# EAGLE board 64panel-Panel (EAGLE 9.1.0), part 1 of 4
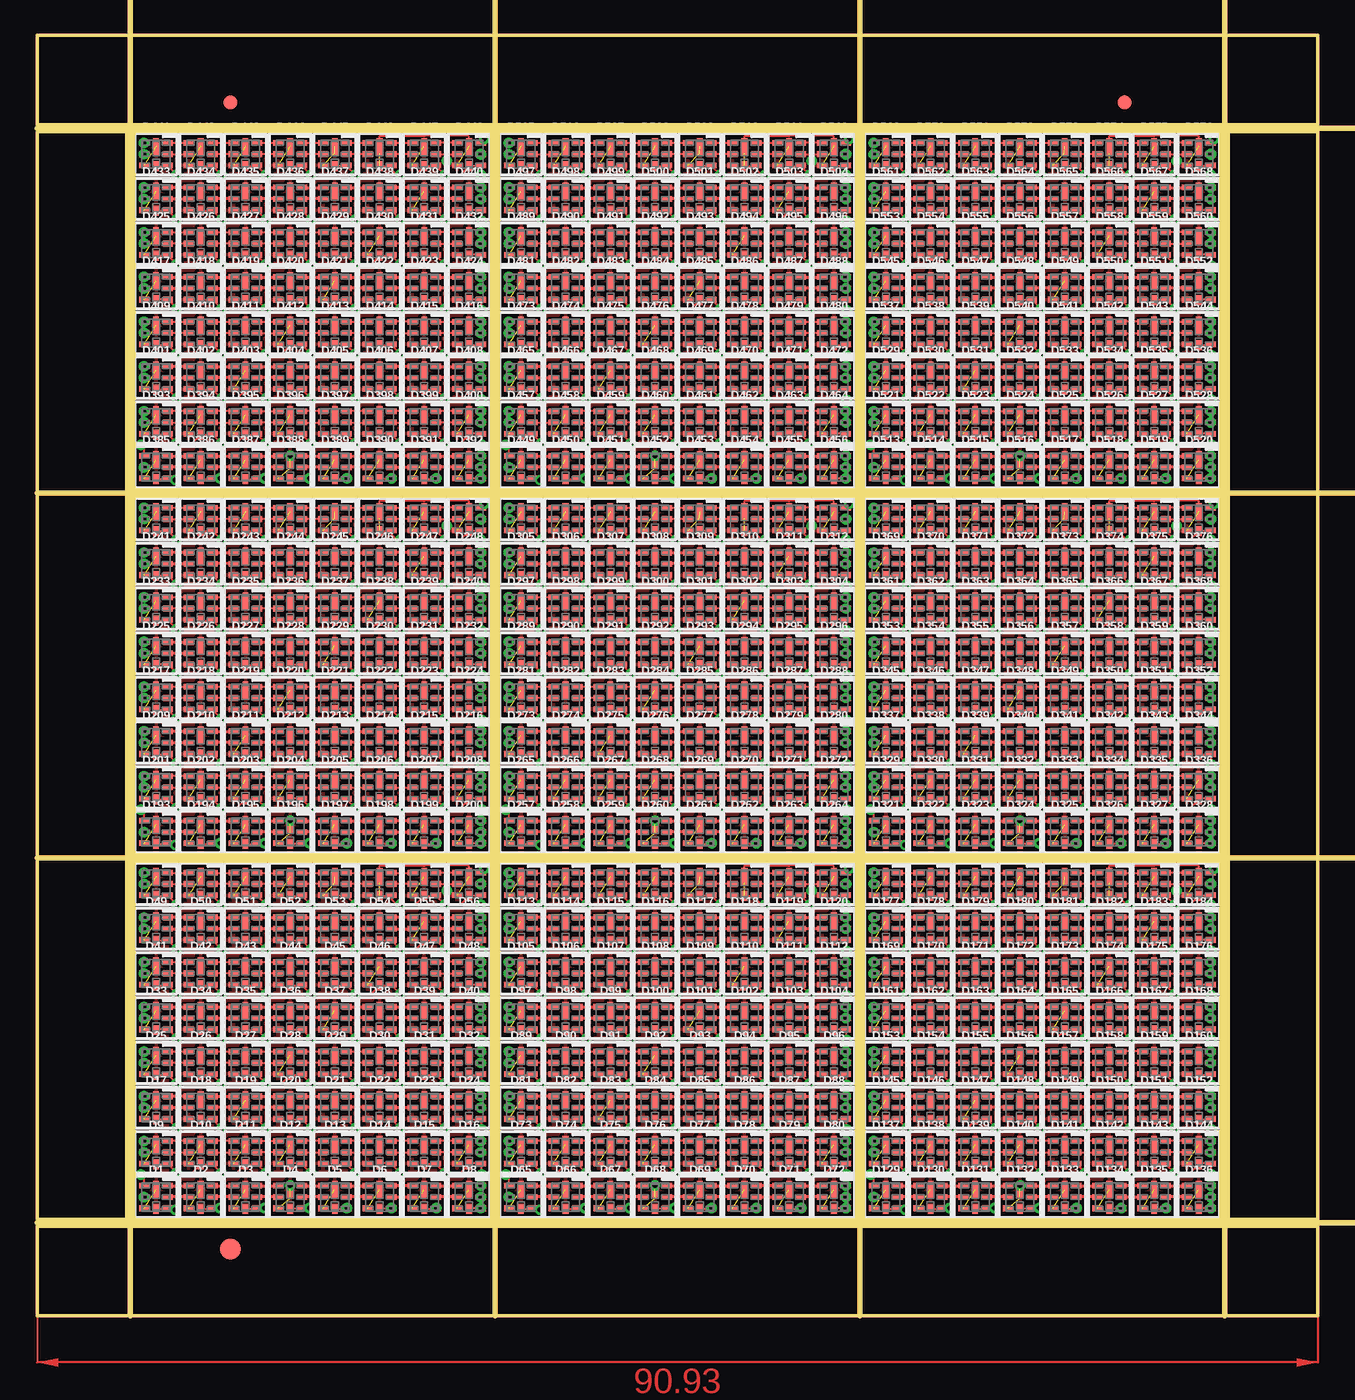
[diagram p0: board, top side]
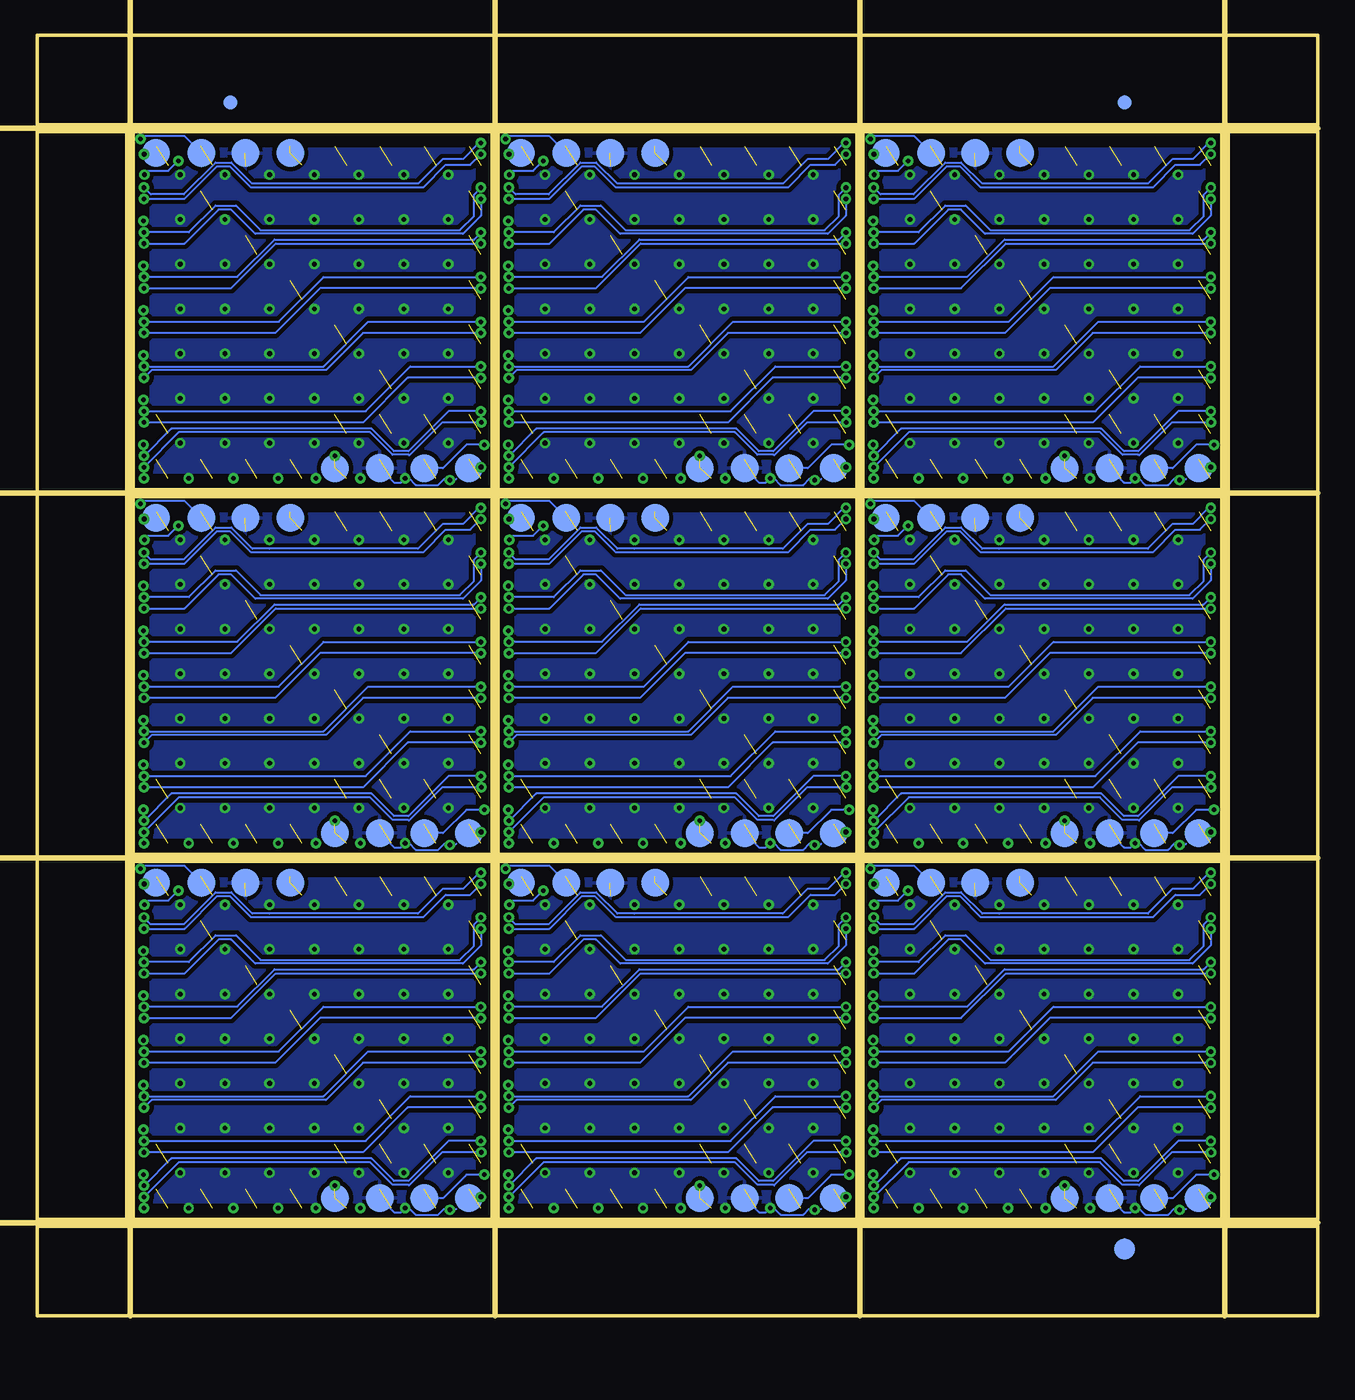
[diagram p1: board, bottom side, seen from below]

Size 90.93 x 90.93 mm. Coordinates in mm from the lower left corner, seen from the top.
Outline: 6.86,6.86 32.26,6.86 32.26,32.26 6.86,32.26 6.86,6.86
Outline: 32.77,6.86 58.17,6.86 58.17,32.26 32.77,32.26 32.77,6.86
Outline: 58.67,6.86 84.07,6.86 84.07,32.26 58.67,32.26 58.67,6.86
Outline: 6.86,32.77 32.26,32.77 32.26,58.17 6.86,58.17 6.86,32.77
Outline: 32.77,32.77 58.17,32.77 58.17,58.17 32.77,58.17 32.77,32.77
Outline: 58.67,32.77 84.07,32.77 84.07,58.17 58.67,58.17 58.67,32.77
Outline: 6.86,58.67 32.26,58.67 32.26,84.07 6.86,84.07 6.86,58.67
Outline: 32.77,58.67 58.17,58.67 58.17,84.07 32.77,84.07 32.77,58.67
Outline: 58.67,58.67 84.07,58.67 84.07,84.07 58.67,84.07 58.67,58.67
Outline: 0,6.35 90.93,6.35 90.93,0 0,0 0,6.35
Outline: 84.58,84.07 90.93,84.07 90.93,6.86 84.58,6.86 84.58,84.07
Outline: 0,90.93 90.93,90.93 90.93,84.58 0,84.58 0,90.93
Outline: 0,84.07 6.35,84.07 6.35,6.86 0,6.86 0,84.07
Copper layers (1*16): Top 0.035mm / dielectric 1.5mm / Bottom 0.035mm
Design rules "default": minimum track width 6mil, minimum drill 0.35mm, track to track 6mil, track to pad 6mil, pad to pad 6mil, via to via 6mil, smd to smd 6mil, copper to edge 40mil, drill to drill 6mil, minimum pad ring 10mil, minimum via ring 8mil, stop-mask expansion 4mil, vias tented up to drill 0mil, thermal gap 10mil
Milling: 8 lines

## Footprints (pad centres in the part's own frame; a part is rotated, then mirrored left to right if it is on the bottom)
APA102-2020 = smd 0.7 x 0.4: CKI -0.85,0; CKO 0.85,0; GND -0.85,-0.8; SDI -0.85,0.8; SDO 0.85,0.8; VDD 0.85,-0.8 | smd 0.4 x 1.2: GNDPAD 0,0.55 | smd 0.4 x 0.7: VDDPAD 0,-0.85
FIDUCIAL-1X2 = smd 1 x 1: 1 0,0
FIDUCIAL-1.5X3 = smd 1.5 x 1.5: 1 0,0
CIRCULARPAD = smd 2 x 2: P$1 0,0

## Placement (x,y rotation side)
D1  APA1022020  [APA102-2020]  8.45,8.45 0 top
D2  APA1022020  [APA102-2020]  11.62,8.45 0 top
D3  APA1022020  [APA102-2020]  14.8,8.45 0 top
D4  APA1022020  [APA102-2020]  17.97,8.45 0 top
D5  APA1022020  [APA102-2020]  21.15,8.45 0 top
D6  APA1022020  [APA102-2020]  24.32,8.45 0 top
D7  APA1022020  [APA102-2020]  27.5,8.45 0 top
D8  APA1022020  [APA102-2020]  30.67,8.45 0 top
D9  APA1022020  [APA102-2020]  8.45,11.62 0 top
D10  APA1022020  [APA102-2020]  11.62,11.62 0 top
D11  APA1022020  [APA102-2020]  14.8,11.62 0 top
D12  APA1022020  [APA102-2020]  17.97,11.62 0 top
D13  APA1022020  [APA102-2020]  21.15,11.62 0 top
D14  APA1022020  [APA102-2020]  24.32,11.62 0 top
D15  APA1022020  [APA102-2020]  27.5,11.62 0 top
D16  APA1022020  [APA102-2020]  30.67,11.62 0 top
D17  APA1022020  [APA102-2020]  8.45,14.8 0 top
D18  APA1022020  [APA102-2020]  11.62,14.8 0 top
D19  APA1022020  [APA102-2020]  14.8,14.8 0 top
D20  APA1022020  [APA102-2020]  17.97,14.8 0 top
D21  APA1022020  [APA102-2020]  21.15,14.8 0 top
D22  APA1022020  [APA102-2020]  24.32,14.8 0 top
D23  APA1022020  [APA102-2020]  27.5,14.8 0 top
D24  APA1022020  [APA102-2020]  30.67,14.8 0 top
D25  APA1022020  [APA102-2020]  8.45,17.97 0 top
D26  APA1022020  [APA102-2020]  11.62,17.97 0 top
D27  APA1022020  [APA102-2020]  14.8,17.97 0 top
D28  APA1022020  [APA102-2020]  17.97,17.97 0 top
D29  APA1022020  [APA102-2020]  21.15,17.97 0 top
D30  APA1022020  [APA102-2020]  24.32,17.97 0 top
D31  APA1022020  [APA102-2020]  27.5,17.97 0 top
D32  APA1022020  [APA102-2020]  30.67,17.97 0 top
D33  APA1022020  [APA102-2020]  8.45,21.15 0 top
D34  APA1022020  [APA102-2020]  11.62,21.15 0 top
D35  APA1022020  [APA102-2020]  14.8,21.15 0 top
D36  APA1022020  [APA102-2020]  17.97,21.15 0 top
D37  APA1022020  [APA102-2020]  21.15,21.15 0 top
D38  APA1022020  [APA102-2020]  24.32,21.15 0 top
D39  APA1022020  [APA102-2020]  27.5,21.15 0 top
D40  APA1022020  [APA102-2020]  30.67,21.15 0 top
D41  APA1022020  [APA102-2020]  8.45,24.32 0 top
D42  APA1022020  [APA102-2020]  11.62,24.32 0 top
D43  APA1022020  [APA102-2020]  14.8,24.32 0 top
D44  APA1022020  [APA102-2020]  17.97,24.32 0 top
D45  APA1022020  [APA102-2020]  21.15,24.32 0 top
D46  APA1022020  [APA102-2020]  24.32,24.32 0 top
D47  APA1022020  [APA102-2020]  27.5,24.32 0 top
D48  APA1022020  [APA102-2020]  30.67,24.32 0 top
D49  APA1022020  [APA102-2020]  8.45,27.5 0 top
D50  APA1022020  [APA102-2020]  11.62,27.5 0 top
D51  APA1022020  [APA102-2020]  14.8,27.5 0 top
D52  APA1022020  [APA102-2020]  17.97,27.5 0 top
D53  APA1022020  [APA102-2020]  21.15,27.5 0 top
D54  APA1022020  [APA102-2020]  24.32,27.5 0 top
D55  APA1022020  [APA102-2020]  27.5,27.5 0 top
D56  APA1022020  [APA102-2020]  30.67,27.5 0 top
D57  APA1022020  [APA102-2020]  8.45,30.67 0 top
D58  APA1022020  [APA102-2020]  11.62,30.67 0 top
D59  APA1022020  [APA102-2020]  14.8,30.67 0 top
D60  APA1022020  [APA102-2020]  17.97,30.67 0 top
D61  APA1022020  [APA102-2020]  21.15,30.67 0 top
D62  APA1022020  [APA102-2020]  24.32,30.67 0 top
D63  APA1022020  [APA102-2020]  27.5,30.67 0 top
D64  APA1022020  [APA102-2020]  30.67,30.67 0 top
D65  APA1022020  [APA102-2020]  34.35,8.45 0 top
D66  APA1022020  [APA102-2020]  37.53,8.45 0 top
D67  APA1022020  [APA102-2020]  40.7,8.45 0 top
D68  APA1022020  [APA102-2020]  43.88,8.45 0 top
D69  APA1022020  [APA102-2020]  47.05,8.45 0 top
D70  APA1022020  [APA102-2020]  50.23,8.45 0 top
D71  APA1022020  [APA102-2020]  53.4,8.45 0 top
D72  APA1022020  [APA102-2020]  56.58,8.45 0 top
D73  APA1022020  [APA102-2020]  34.35,11.62 0 top
D74  APA1022020  [APA102-2020]  37.53,11.62 0 top
D75  APA1022020  [APA102-2020]  40.7,11.62 0 top
D76  APA1022020  [APA102-2020]  43.88,11.62 0 top
D77  APA1022020  [APA102-2020]  47.05,11.62 0 top
D78  APA1022020  [APA102-2020]  50.23,11.62 0 top
D79  APA1022020  [APA102-2020]  53.4,11.62 0 top
D80  APA1022020  [APA102-2020]  56.58,11.62 0 top
D81  APA1022020  [APA102-2020]  34.35,14.8 0 top
D82  APA1022020  [APA102-2020]  37.53,14.8 0 top
D83  APA1022020  [APA102-2020]  40.7,14.8 0 top
D84  APA1022020  [APA102-2020]  43.88,14.8 0 top
D85  APA1022020  [APA102-2020]  47.05,14.8 0 top
D86  APA1022020  [APA102-2020]  50.23,14.8 0 top
D87  APA1022020  [APA102-2020]  53.4,14.8 0 top
D88  APA1022020  [APA102-2020]  56.58,14.8 0 top
D89  APA1022020  [APA102-2020]  34.35,17.97 0 top
D90  APA1022020  [APA102-2020]  37.53,17.97 0 top
D91  APA1022020  [APA102-2020]  40.7,17.97 0 top
D92  APA1022020  [APA102-2020]  43.88,17.97 0 top
D93  APA1022020  [APA102-2020]  47.05,17.97 0 top
D94  APA1022020  [APA102-2020]  50.23,17.97 0 top
D95  APA1022020  [APA102-2020]  53.4,17.97 0 top
D96  APA1022020  [APA102-2020]  56.58,17.97 0 top
D97  APA1022020  [APA102-2020]  34.35,21.15 0 top
D98  APA1022020  [APA102-2020]  37.53,21.15 0 top
D99  APA1022020  [APA102-2020]  40.7,21.15 0 top
D100  APA1022020  [APA102-2020]  43.88,21.15 0 top
D101  APA1022020  [APA102-2020]  47.05,21.15 0 top
D102  APA1022020  [APA102-2020]  50.23,21.15 0 top
D103  APA1022020  [APA102-2020]  53.4,21.15 0 top
D104  APA1022020  [APA102-2020]  56.58,21.15 0 top
D105  APA1022020  [APA102-2020]  34.35,24.32 0 top
D106  APA1022020  [APA102-2020]  37.53,24.32 0 top
D107  APA1022020  [APA102-2020]  40.7,24.32 0 top
D108  APA1022020  [APA102-2020]  43.88,24.32 0 top
D109  APA1022020  [APA102-2020]  47.05,24.32 0 top
D110  APA1022020  [APA102-2020]  50.23,24.32 0 top
D111  APA1022020  [APA102-2020]  53.4,24.32 0 top
D112  APA1022020  [APA102-2020]  56.58,24.32 0 top
D113  APA1022020  [APA102-2020]  34.35,27.5 0 top
D114  APA1022020  [APA102-2020]  37.53,27.5 0 top
D115  APA1022020  [APA102-2020]  40.7,27.5 0 top
D116  APA1022020  [APA102-2020]  43.88,27.5 0 top
D117  APA1022020  [APA102-2020]  47.05,27.5 0 top
D118  APA1022020  [APA102-2020]  50.23,27.5 0 top
D119  APA1022020  [APA102-2020]  53.4,27.5 0 top
D120  APA1022020  [APA102-2020]  56.58,27.5 0 top
D121  APA1022020  [APA102-2020]  34.35,30.67 0 top
D122  APA1022020  [APA102-2020]  37.53,30.67 0 top
D123  APA1022020  [APA102-2020]  40.7,30.67 0 top
D124  APA1022020  [APA102-2020]  43.88,30.67 0 top
D125  APA1022020  [APA102-2020]  47.05,30.67 0 top
D126  APA1022020  [APA102-2020]  50.23,30.67 0 top
D127  APA1022020  [APA102-2020]  53.4,30.67 0 top
D128  APA1022020  [APA102-2020]  56.58,30.67 0 top
D129  APA1022020  [APA102-2020]  60.26,8.45 0 top
D130  APA1022020  [APA102-2020]  63.44,8.45 0 top
D131  APA1022020  [APA102-2020]  66.61,8.45 0 top
D132  APA1022020  [APA102-2020]  69.79,8.45 0 top
D133  APA1022020  [APA102-2020]  72.96,8.45 0 top
D134  APA1022020  [APA102-2020]  76.14,8.45 0 top
D135  APA1022020  [APA102-2020]  79.31,8.45 0 top
D136  APA1022020  [APA102-2020]  82.49,8.45 0 top
D137  APA1022020  [APA102-2020]  60.26,11.62 0 top
D138  APA1022020  [APA102-2020]  63.44,11.62 0 top
D139  APA1022020  [APA102-2020]  66.61,11.62 0 top
D140  APA1022020  [APA102-2020]  69.79,11.62 0 top
D141  APA1022020  [APA102-2020]  72.96,11.62 0 top
D142  APA1022020  [APA102-2020]  76.14,11.62 0 top
D143  APA1022020  [APA102-2020]  79.31,11.62 0 top
D144  APA1022020  [APA102-2020]  82.49,11.62 0 top
D145  APA1022020  [APA102-2020]  60.26,14.8 0 top
D146  APA1022020  [APA102-2020]  63.44,14.8 0 top
D147  APA1022020  [APA102-2020]  66.61,14.8 0 top
D148  APA1022020  [APA102-2020]  69.79,14.8 0 top
D149  APA1022020  [APA102-2020]  72.96,14.8 0 top
D150  APA1022020  [APA102-2020]  76.14,14.8 0 top
D151  APA1022020  [APA102-2020]  79.31,14.8 0 top
D152  APA1022020  [APA102-2020]  82.49,14.8 0 top
D153  APA1022020  [APA102-2020]  60.26,17.97 0 top
D154  APA1022020  [APA102-2020]  63.44,17.97 0 top
D155  APA1022020  [APA102-2020]  66.61,17.97 0 top
D156  APA1022020  [APA102-2020]  69.79,17.97 0 top
D157  APA1022020  [APA102-2020]  72.96,17.97 0 top
D158  APA1022020  [APA102-2020]  76.14,17.97 0 top
D159  APA1022020  [APA102-2020]  79.31,17.97 0 top
D160  APA1022020  [APA102-2020]  82.49,17.97 0 top
D161  APA1022020  [APA102-2020]  60.26,21.15 0 top
D162  APA1022020  [APA102-2020]  63.44,21.15 0 top
D163  APA1022020  [APA102-2020]  66.61,21.15 0 top
D164  APA1022020  [APA102-2020]  69.79,21.15 0 top
D165  APA1022020  [APA102-2020]  72.96,21.15 0 top
D166  APA1022020  [APA102-2020]  76.14,21.15 0 top
D167  APA1022020  [APA102-2020]  79.31,21.15 0 top
D168  APA1022020  [APA102-2020]  82.49,21.15 0 top
D169  APA1022020  [APA102-2020]  60.26,24.32 0 top
D170  APA1022020  [APA102-2020]  63.44,24.32 0 top
D171  APA1022020  [APA102-2020]  66.61,24.32 0 top
D172  APA1022020  [APA102-2020]  69.79,24.32 0 top
D173  APA1022020  [APA102-2020]  72.96,24.32 0 top
D174  APA1022020  [APA102-2020]  76.14,24.32 0 top
D175  APA1022020  [APA102-2020]  79.31,24.32 0 top
D176  APA1022020  [APA102-2020]  82.49,24.32 0 top
D177  APA1022020  [APA102-2020]  60.26,27.5 0 top
D178  APA1022020  [APA102-2020]  63.44,27.5 0 top
D179  APA1022020  [APA102-2020]  66.61,27.5 0 top
D180  APA1022020  [APA102-2020]  69.79,27.5 0 top
D181  APA1022020  [APA102-2020]  72.96,27.5 0 top
D182  APA1022020  [APA102-2020]  76.14,27.5 0 top
D183  APA1022020  [APA102-2020]  79.31,27.5 0 top
D184  APA1022020  [APA102-2020]  82.49,27.5 0 top
D185  APA1022020  [APA102-2020]  60.26,30.67 0 top
D186  APA1022020  [APA102-2020]  63.44,30.67 0 top
D187  APA1022020  [APA102-2020]  66.61,30.67 0 top
D188  APA1022020  [APA102-2020]  69.79,30.67 0 top
D189  APA1022020  [APA102-2020]  72.96,30.67 0 top
D190  APA1022020  [APA102-2020]  76.14,30.67 0 top
D191  APA1022020  [APA102-2020]  79.31,30.67 0 top
D192  APA1022020  [APA102-2020]  82.49,30.67 0 top
D193  APA1022020  [APA102-2020]  8.45,34.35 0 top
D194  APA1022020  [APA102-2020]  11.62,34.35 0 top
D195  APA1022020  [APA102-2020]  14.8,34.35 0 top
D196  APA1022020  [APA102-2020]  17.97,34.35 0 top
D197  APA1022020  [APA102-2020]  21.15,34.35 0 top
D198  APA1022020  [APA102-2020]  24.32,34.35 0 top
D199  APA1022020  [APA102-2020]  27.5,34.35 0 top
D200  APA1022020  [APA102-2020]  30.67,34.35 0 top
D201  APA1022020  [APA102-2020]  8.45,37.53 0 top
D202  APA1022020  [APA102-2020]  11.62,37.53 0 top
D203  APA1022020  [APA102-2020]  14.8,37.53 0 top
D204  APA1022020  [APA102-2020]  17.97,37.53 0 top
D205  APA1022020  [APA102-2020]  21.15,37.53 0 top
D206  APA1022020  [APA102-2020]  24.32,37.53 0 top
D207  APA1022020  [APA102-2020]  27.5,37.53 0 top
D208  APA1022020  [APA102-2020]  30.67,37.53 0 top
D209  APA1022020  [APA102-2020]  8.45,40.7 0 top
D210  APA1022020  [APA102-2020]  11.62,40.7 0 top
D211  APA1022020  [APA102-2020]  14.8,40.7 0 top
D212  APA1022020  [APA102-2020]  17.97,40.7 0 top
D213  APA1022020  [APA102-2020]  21.15,40.7 0 top
D214  APA1022020  [APA102-2020]  24.32,40.7 0 top
D215  APA1022020  [APA102-2020]  27.5,40.7 0 top
D216  APA1022020  [APA102-2020]  30.67,40.7 0 top
D217  APA1022020  [APA102-2020]  8.45,43.88 0 top
D218  APA1022020  [APA102-2020]  11.62,43.88 0 top
D219  APA1022020  [APA102-2020]  14.8,43.88 0 top
D220  APA1022020  [APA102-2020]  17.97,43.88 0 top
D221  APA1022020  [APA102-2020]  21.15,43.88 0 top
D222  APA1022020  [APA102-2020]  24.32,43.88 0 top
D223  APA1022020  [APA102-2020]  27.5,43.88 0 top
D224  APA1022020  [APA102-2020]  30.67,43.88 0 top
D225  APA1022020  [APA102-2020]  8.45,47.05 0 top
D226  APA1022020  [APA102-2020]  11.62,47.05 0 top
D227  APA1022020  [APA102-2020]  14.8,47.05 0 top
D228  APA1022020  [APA102-2020]  17.97,47.05 0 top
D229  APA1022020  [APA102-2020]  21.15,47.05 0 top
D230  APA1022020  [APA102-2020]  24.32,47.05 0 top
D231  APA1022020  [APA102-2020]  27.5,47.05 0 top
D232  APA1022020  [APA102-2020]  30.67,47.05 0 top
D233  APA1022020  [APA102-2020]  8.45,50.23 0 top
D234  APA1022020  [APA102-2020]  11.62,50.23 0 top
D235  APA1022020  [APA102-2020]  14.8,50.23 0 top
D236  APA1022020  [APA102-2020]  17.97,50.23 0 top
D237  APA1022020  [APA102-2020]  21.15,50.23 0 top
D238  APA1022020  [APA102-2020]  24.32,50.23 0 top
D239  APA1022020  [APA102-2020]  27.5,50.23 0 top
D240  APA1022020  [APA102-2020]  30.67,50.23 0 top
D241  APA1022020  [APA102-2020]  8.45,53.4 0 top
D242  APA1022020  [APA102-2020]  11.62,53.4 0 top
D243  APA1022020  [APA102-2020]  14.8,53.4 0 top
D244  APA1022020  [APA102-2020]  17.97,53.4 0 top
D245  APA1022020  [APA102-2020]  21.15,53.4 0 top
D246  APA1022020  [APA102-2020]  24.32,53.4 0 top
D247  APA1022020  [APA102-2020]  27.5,53.4 0 top
D248  APA1022020  [APA102-2020]  30.67,53.4 0 top
D249  APA1022020  [APA102-2020]  8.45,56.58 0 top
D250  APA1022020  [APA102-2020]  11.62,56.58 0 top
D251  APA1022020  [APA102-2020]  14.8,56.58 0 top
D252  APA1022020  [APA102-2020]  17.97,56.58 0 top
D253  APA1022020  [APA102-2020]  21.15,56.58 0 top
D254  APA1022020  [APA102-2020]  24.32,56.58 0 top
D255  APA1022020  [APA102-2020]  27.5,56.58 0 top
D256  APA1022020  [APA102-2020]  30.67,56.58 0 top
D257  APA1022020  [APA102-2020]  34.35,34.35 0 top
D258  APA1022020  [APA102-2020]  37.53,34.35 0 top
D259  APA1022020  [APA102-2020]  40.7,34.35 0 top
D260  APA1022020  [APA102-2020]  43.88,34.35 0 top
D261  APA1022020  [APA102-2020]  47.05,34.35 0 top
D262  APA1022020  [APA102-2020]  50.23,34.35 0 top
D263  APA1022020  [APA102-2020]  53.4,34.35 0 top
D264  APA1022020  [APA102-2020]  56.58,34.35 0 top
D265  APA1022020  [APA102-2020]  34.35,37.53 0 top
D266  APA1022020  [APA102-2020]  37.53,37.53 0 top
D267  APA1022020  [APA102-2020]  40.7,37.53 0 top
D268  APA1022020  [APA102-2020]  43.88,37.53 0 top
D269  APA1022020  [APA102-2020]  47.05,37.53 0 top
D270  APA1022020  [APA102-2020]  50.23,37.53 0 top
D271  APA1022020  [APA102-2020]  53.4,37.53 0 top
D272  APA1022020  [APA102-2020]  56.58,37.53 0 top
D273  APA1022020  [APA102-2020]  34.35,40.7 0 top
D274  APA1022020  [APA102-2020]  37.53,40.7 0 top
D275  APA1022020  [APA102-2020]  40.7,40.7 0 top
D276  APA1022020  [APA102-2020]  43.88,40.7 0 top
D277  APA1022020  [APA102-2020]  47.05,40.7 0 top
D278  APA1022020  [APA102-2020]  50.23,40.7 0 top
D279  APA1022020  [APA102-2020]  53.4,40.7 0 top
D280  APA1022020  [APA102-2020]  56.58,40.7 0 top
D281  APA1022020  [APA102-2020]  34.35,43.88 0 top
D282  APA1022020  [APA102-2020]  37.53,43.88 0 top
D283  APA1022020  [APA102-2020]  40.7,43.88 0 top
D284  APA1022020  [APA102-2020]  43.88,43.88 0 top
D285  APA1022020  [APA102-2020]  47.05,43.88 0 top
D286  APA1022020  [APA102-2020]  50.23,43.88 0 top
D287  APA1022020  [APA102-2020]  53.4,43.88 0 top
D288  APA1022020  [APA102-2020]  56.58,43.88 0 top
D289  APA1022020  [APA102-2020]  34.35,47.05 0 top
D290  APA1022020  [APA102-2020]  37.53,47.05 0 top
D291  APA1022020  [APA102-2020]  40.7,47.05 0 top
D292  APA1022020  [APA102-2020]  43.88,47.05 0 top
D293  APA1022020  [APA102-2020]  47.05,47.05 0 top
D294  APA1022020  [APA102-2020]  50.23,47.05 0 top
D295  APA1022020  [APA102-2020]  53.4,47.05 0 top
D296  APA1022020  [APA102-2020]  56.58,47.05 0 top
D297  APA1022020  [APA102-2020]  34.35,50.23 0 top
D298  APA1022020  [APA102-2020]  37.53,50.23 0 top
D299  APA1022020  [APA102-2020]  40.7,50.23 0 top
D300  APA1022020  [APA102-2020]  43.88,50.23 0 top
D301  APA1022020  [APA102-2020]  47.05,50.23 0 top
D302  APA1022020  [APA102-2020]  50.23,50.23 0 top
D303  APA1022020  [APA102-2020]  53.4,50.23 0 top
D304  APA1022020  [APA102-2020]  56.58,50.23 0 top
D305  APA1022020  [APA102-2020]  34.35,53.4 0 top
D306  APA1022020  [APA102-2020]  37.53,53.4 0 top
D307  APA1022020  [APA102-2020]  40.7,53.4 0 top
D308  APA1022020  [APA102-2020]  43.88,53.4 0 top
D309  APA1022020  [APA102-2020]  47.05,53.4 0 top
D310  APA1022020  [APA102-2020]  50.23,53.4 0 top
D311  APA1022020  [APA102-2020]  53.4,53.4 0 top
D312  APA1022020  [APA102-2020]  56.58,53.4 0 top
D313  APA1022020  [APA102-2020]  34.35,56.58 0 top
D314  APA1022020  [APA102-2020]  37.53,56.58 0 top
D315  APA1022020  [APA102-2020]  40.7,56.58 0 top
D316  APA1022020  [APA102-2020]  43.88,56.58 0 top
D317  APA1022020  [APA102-2020]  47.05,56.58 0 top
D318  APA1022020  [APA102-2020]  50.23,56.58 0 top
D319  APA1022020  [APA102-2020]  53.4,56.58 0 top
D320  APA1022020  [APA102-2020]  56.58,56.58 0 top
D321  APA1022020  [APA102-2020]  60.26,34.35 0 top
D322  APA1022020  [APA102-2020]  63.44,34.35 0 top
D323  APA1022020  [APA102-2020]  66.61,34.35 0 top
D324  APA1022020  [APA102-2020]  69.79,34.35 0 top
D325  APA1022020  [APA102-2020]  72.96,34.35 0 top
D326  APA1022020  [APA102-2020]  76.14,34.35 0 top
D327  APA1022020  [APA102-2020]  79.31,34.35 0 top
D328  APA1022020  [APA102-2020]  82.49,34.35 0 top
D329  APA1022020  [APA102-2020]  60.26,37.53 0 top
D330  APA1022020  [APA102-2020]  63.44,37.53 0 top
D331  APA1022020  [APA102-2020]  66.61,37.53 0 top
D332  APA1022020  [APA102-2020]  69.79,37.53 0 top
D333  APA1022020  [APA102-2020]  72.96,37.53 0 top
D334  APA1022020  [APA102-2020]  76.14,37.53 0 top
D335  APA1022020  [APA102-2020]  79.31,37.53 0 top
D336  APA1022020  [APA102-2020]  82.49,37.53 0 top
D337  APA1022020  [APA102-2020]  60.26,40.7 0 top
D338  APA1022020  [APA102-2020]  63.44,40.7 0 top
D339  APA1022020  [APA102-2020]  66.61,40.7 0 top
D340  APA1022020  [APA102-2020]  69.79,40.7 0 top
D341  APA1022020  [APA102-2020]  72.96,40.7 0 top
D342  APA1022020  [APA102-2020]  76.14,40.7 0 top
D343  APA1022020  [APA102-2020]  79.31,40.7 0 top
D344  APA1022020  [APA102-2020]  82.49,40.7 0 top
D345  APA1022020  [APA102-2020]  60.26,43.88 0 top
D346  APA1022020  [APA102-2020]  63.44,43.88 0 top
D347  APA1022020  [APA102-2020]  66.61,43.88 0 top
D348  APA1022020  [APA102-2020]  69.79,43.88 0 top
D349  APA1022020  [APA102-2020]  72.96,43.88 0 top
D350  APA1022020  [APA102-2020]  76.14,43.88 0 top
D351  APA1022020  [APA102-2020]  79.31,43.88 0 top
D352  APA1022020  [APA102-2020]  82.49,43.88 0 top
D353  APA1022020  [APA102-2020]  60.26,47.05 0 top
D354  APA1022020  [APA102-2020]  63.44,47.05 0 top
D355  APA1022020  [APA102-2020]  66.61,47.05 0 top
D356  APA1022020  [APA102-2020]  69.79,47.05 0 top
D357  APA1022020  [APA102-2020]  72.96,47.05 0 top
D358  APA1022020  [APA102-2020]  76.14,47.05 0 top
D359  APA1022020  [APA102-2020]  79.31,47.05 0 top
D360  APA1022020  [APA102-2020]  82.49,47.05 0 top
D361  APA1022020  [APA102-2020]  60.26,50.23 0 top
D362  APA1022020  [APA102-2020]  63.44,50.23 0 top
D363  APA1022020  [APA102-2020]  66.61,50.23 0 top
D364  APA1022020  [APA102-2020]  69.79,50.23 0 top
D365  APA1022020  [APA102-2020]  72.96,50.23 0 top
D366  APA1022020  [APA102-2020]  76.14,50.23 0 top
D367  APA1022020  [APA102-2020]  79.31,50.23 0 top
D368  APA1022020  [APA102-2020]  82.49,50.23 0 top
D369  APA1022020  [APA102-2020]  60.26,53.4 0 top
D370  APA1022020  [APA102-2020]  63.44,53.4 0 top
D371  APA1022020  [APA102-2020]  66.61,53.4 0 top
D372  APA1022020  [APA102-2020]  69.79,53.4 0 top
D373  APA1022020  [APA102-2020]  72.96,53.4 0 top
D374  APA1022020  [APA102-2020]  76.14,53.4 0 top
D375  APA1022020  [APA102-2020]  79.31,53.4 0 top
D376  APA1022020  [APA102-2020]  82.49,53.4 0 top
D377  APA1022020  [APA102-2020]  60.26,56.58 0 top
D378  APA1022020  [APA102-2020]  63.44,56.58 0 top
D379  APA1022020  [APA102-2020]  66.61,56.58 0 top
D380  APA1022020  [APA102-2020]  69.79,56.58 0 top
D381  APA1022020  [APA102-2020]  72.96,56.58 0 top
D382  APA1022020  [APA102-2020]  76.14,56.58 0 top
D383  APA1022020  [APA102-2020]  79.31,56.58 0 top
D384  APA1022020  [APA102-2020]  82.49,56.58 0 top
D385  APA1022020  [APA102-2020]  8.45,60.26 0 top
D386  APA1022020  [APA102-2020]  11.62,60.26 0 top
D387  APA1022020  [APA102-2020]  14.8,60.26 0 top
D388  APA1022020  [APA102-2020]  17.97,60.26 0 top
D389  APA1022020  [APA102-2020]  21.15,60.26 0 top
D390  APA1022020  [APA102-2020]  24.32,60.26 0 top
D391  APA1022020  [APA102-2020]  27.5,60.26 0 top
D392  APA1022020  [APA102-2020]  30.67,60.26 0 top
D393  APA1022020  [APA102-2020]  8.45,63.44 0 top
D394  APA1022020  [APA102-2020]  11.62,63.44 0 top
D395  APA1022020  [APA102-2020]  14.8,63.44 0 top
D396  APA1022020  [APA102-2020]  17.97,63.44 0 top
D397  APA1022020  [APA102-2020]  21.15,63.44 0 top
D398  APA1022020  [APA102-2020]  24.32,63.44 0 top
D399  APA1022020  [APA102-2020]  27.5,63.44 0 top
D400  APA1022020  [APA102-2020]  30.67,63.44 0 top
D401  APA1022020  [APA102-2020]  8.45,66.61 0 top
D402  APA1022020  [APA102-2020]  11.62,66.61 0 top
D403  APA1022020  [APA102-2020]  14.8,66.61 0 top
D404  APA1022020  [APA102-2020]  17.97,66.61 0 top
D405  APA1022020  [APA102-2020]  21.15,66.61 0 top
D406  APA1022020  [APA102-2020]  24.32,66.61 0 top
D407  APA1022020  [APA102-2020]  27.5,66.61 0 top
D408  APA1022020  [APA102-2020]  30.67,66.61 0 top
D409  APA1022020  [APA102-2020]  8.45,69.79 0 top
D410  APA1022020  [APA102-2020]  11.62,69.79 0 top
D411  APA1022020  [APA102-2020]  14.8,69.79 0 top
D412  APA1022020  [APA102-2020]  17.97,69.79 0 top
D413  APA1022020  [APA102-2020]  21.15,69.79 0 top
D414  APA1022020  [APA102-2020]  24.32,69.79 0 top
D415  APA1022020  [APA102-2020]  27.5,69.79 0 top
D416  APA1022020  [APA102-2020]  30.67,69.79 0 top
D417  APA1022020  [APA102-2020]  8.45,72.96 0 top
D418  APA1022020  [APA102-2020]  11.62,72.96 0 top
D419  APA1022020  [APA102-2020]  14.8,72.96 0 top
D420  APA1022020  [APA102-2020]  17.97,72.96 0 top
D421  APA1022020  [APA102-2020]  21.15,72.96 0 top
D422  APA1022020  [APA102-2020]  24.32,72.96 0 top
D423  APA1022020  [APA102-2020]  27.5,72.96 0 top
D424  APA1022020  [APA102-2020]  30.67,72.96 0 top
D425  APA1022020  [APA102-2020]  8.45,76.14 0 top
D426  APA1022020  [APA102-2020]  11.62,76.14 0 top
D427  APA1022020  [APA102-2020]  14.8,76.14 0 top
D428  APA1022020  [APA102-2020]  17.97,76.14 0 top
D429  APA1022020  [APA102-2020]  21.15,76.14 0 top
D430  APA1022020  [APA102-2020]  24.32,76.14 0 top
D431  APA1022020  [APA102-2020]  27.5,76.14 0 top
D432  APA1022020  [APA102-2020]  30.67,76.14 0 top
D433  APA1022020  [APA102-2020]  8.45,79.31 0 top
D434  APA1022020  [APA102-2020]  11.62,79.31 0 top
D435  APA1022020  [APA102-2020]  14.8,79.31 0 top
D436  APA1022020  [APA102-2020]  17.97,79.31 0 top
D437  APA1022020  [APA102-2020]  21.15,79.31 0 top
D438  APA1022020  [APA102-2020]  24.32,79.31 0 top
D439  APA1022020  [APA102-2020]  27.5,79.31 0 top
D440  APA1022020  [APA102-2020]  30.67,79.31 0 top
D441  APA1022020  [APA102-2020]  8.45,82.49 0 top
D442  APA1022020  [APA102-2020]  11.62,82.49 0 top
D443  APA1022020  [APA102-2020]  14.8,82.49 0 top
D444  APA1022020  [APA102-2020]  17.97,82.49 0 top
D445  APA1022020  [APA102-2020]  21.15,82.49 0 top
D446  APA1022020  [APA102-2020]  24.32,82.49 0 top
D447  APA1022020  [APA102-2020]  27.5,82.49 0 top
D448  APA1022020  [APA102-2020]  30.67,82.49 0 top
D449  APA1022020  [APA102-2020]  34.35,60.26 0 top
D450  APA1022020  [APA102-2020]  37.53,60.26 0 top
D451  APA1022020  [APA102-2020]  40.7,60.26 0 top
D452  APA1022020  [APA102-2020]  43.88,60.26 0 top
D453  APA1022020  [APA102-2020]  47.05,60.26 0 top
D454  APA1022020  [APA102-2020]  50.23,60.26 0 top
D455  APA1022020  [APA102-2020]  53.4,60.26 0 top
D456  APA1022020  [APA102-2020]  56.58,60.26 0 top
D457  APA1022020  [APA102-2020]  34.35,63.44 0 top
D458  APA1022020  [APA102-2020]  37.53,63.44 0 top
D459  APA1022020  [APA102-2020]  40.7,63.44 0 top
D460  APA1022020  [APA102-2020]  43.88,63.44 0 top
D461  APA1022020  [APA102-2020]  47.05,63.44 0 top
D462  APA1022020  [APA102-2020]  50.23,63.44 0 top
D463  APA1022020  [APA102-2020]  53.4,63.44 0 top
D464  APA1022020  [APA102-2020]  56.58,63.44 0 top
D465  APA1022020  [APA102-2020]  34.35,66.61 0 top
D466  APA1022020  [APA102-2020]  37.53,66.61 0 top
D467  APA1022020  [APA102-2020]  40.7,66.61 0 top
D468  APA1022020  [APA102-2020]  43.88,66.61 0 top
D469  APA1022020  [APA102-2020]  47.05,66.61 0 top
D470  APA1022020  [APA102-2020]  50.23,66.61 0 top
D471  APA1022020  [APA102-2020]  53.4,66.61 0 top
D472  APA1022020  [APA102-2020]  56.58,66.61 0 top
D473  APA1022020  [APA102-2020]  34.35,69.79 0 top
D474  APA1022020  [APA102-2020]  37.53,69.79 0 top
D475  APA1022020  [APA102-2020]  40.7,69.79 0 top
D476  APA1022020  [APA102-2020]  43.88,69.79 0 top
D477  APA1022020  [APA102-2020]  47.05,69.79 0 top
D478  APA1022020  [APA102-2020]  50.23,69.79 0 top
D479  APA1022020  [APA102-2020]  53.4,69.79 0 top
D480  APA1022020  [APA102-2020]  56.58,69.79 0 top
D481  APA1022020  [APA102-2020]  34.35,72.96 0 top
D482  APA1022020  [APA102-2020]  37.53,72.96 0 top
D483  APA1022020  [APA102-2020]  40.7,72.96 0 top
D484  APA1022020  [APA102-2020]  43.88,72.96 0 top
D485  APA1022020  [APA102-2020]  47.05,72.96 0 top
D486  APA1022020  [APA102-2020]  50.23,72.96 0 top
D487  APA1022020  [APA102-2020]  53.4,72.96 0 top
D488  APA1022020  [APA102-2020]  56.58,72.96 0 top
D489  APA1022020  [APA102-2020]  34.35,76.14 0 top
D490  APA1022020  [APA102-2020]  37.53,76.14 0 top
D491  APA1022020  [APA102-2020]  40.7,76.14 0 top
D492  APA1022020  [APA102-2020]  43.88,76.14 0 top
D493  APA1022020  [APA102-2020]  47.05,76.14 0 top
D494  APA1022020  [APA102-2020]  50.23,76.14 0 top
D495  APA1022020  [APA102-2020]  53.4,76.14 0 top
D496  APA1022020  [APA102-2020]  56.58,76.14 0 top
D497  APA1022020  [APA102-2020]  34.35,79.31 0 top
D498  APA1022020  [APA102-2020]  37.53,79.31 0 top
D499  APA1022020  [APA102-2020]  40.7,79.31 0 top
D500  APA1022020  [APA102-2020]  43.88,79.31 0 top
D501  APA1022020  [APA102-2020]  47.05,79.31 0 top
D502  APA1022020  [APA102-2020]  50.23,79.31 0 top
D503  APA1022020  [APA102-2020]  53.4,79.31 0 top
D504  APA1022020  [APA102-2020]  56.58,79.31 0 top
D505  APA1022020  [APA102-2020]  34.35,82.49 0 top
D506  APA1022020  [APA102-2020]  37.53,82.49 0 top
D507  APA1022020  [APA102-2020]  40.7,82.49 0 top
D508  APA1022020  [APA102-2020]  43.88,82.49 0 top
D509  APA1022020  [APA102-2020]  47.05,82.49 0 top
D510  APA1022020  [APA102-2020]  50.23,82.49 0 top
D511  APA1022020  [APA102-2020]  53.4,82.49 0 top
D512  APA1022020  [APA102-2020]  56.58,82.49 0 top
D513  APA1022020  [APA102-2020]  60.26,60.26 0 top
D514  APA1022020  [APA102-2020]  63.44,60.26 0 top
D515  APA1022020  [APA102-2020]  66.61,60.26 0 top
D516  APA1022020  [APA102-2020]  69.79,60.26 0 top
D517  APA1022020  [APA102-2020]  72.96,60.26 0 top
D518  APA1022020  [APA102-2020]  76.14,60.26 0 top
D519  APA1022020  [APA102-2020]  79.31,60.26 0 top
D520  APA1022020  [APA102-2020]  82.49,60.26 0 top
D521  APA1022020  [APA102-2020]  60.26,63.44 0 top
D522  APA1022020  [APA102-2020]  63.44,63.44 0 top
D523  APA1022020  [APA102-2020]  66.61,63.44 0 top
D524  APA1022020  [APA102-2020]  69.79,63.44 0 top
D525  APA1022020  [APA102-2020]  72.96,63.44 0 top
D526  APA1022020  [APA102-2020]  76.14,63.44 0 top
D527  APA1022020  [APA102-2020]  79.31,63.44 0 top
D528  APA1022020  [APA102-2020]  82.49,63.44 0 top
D529  APA1022020  [APA102-2020]  60.26,66.61 0 top
D530  APA1022020  [APA102-2020]  63.44,66.61 0 top
D531  APA1022020  [APA102-2020]  66.61,66.61 0 top
D532  APA1022020  [APA102-2020]  69.79,66.61 0 top
D533  APA1022020  [APA102-2020]  72.96,66.61 0 top
D534  APA1022020  [APA102-2020]  76.14,66.61 0 top
D535  APA1022020  [APA102-2020]  79.31,66.61 0 top
D536  APA1022020  [APA102-2020]  82.49,66.61 0 top
D537  APA1022020  [APA102-2020]  60.26,69.79 0 top
D538  APA1022020  [APA102-2020]  63.44,69.79 0 top
D539  APA1022020  [APA102-2020]  66.61,69.79 0 top
D540  APA1022020  [APA102-2020]  69.79,69.79 0 top
D541  APA1022020  [APA102-2020]  72.96,69.79 0 top
D542  APA1022020  [APA102-2020]  76.14,69.79 0 top
D543  APA1022020  [APA102-2020]  79.31,69.79 0 top
D544  APA1022020  [APA102-2020]  82.49,69.79 0 top
D545  APA1022020  [APA102-2020]  60.26,72.96 0 top
D546  APA1022020  [APA102-2020]  63.44,72.96 0 top
D547  APA1022020  [APA102-2020]  66.61,72.96 0 top
D548  APA1022020  [APA102-2020]  69.79,72.96 0 top
D549  APA1022020  [APA102-2020]  72.96,72.96 0 top
D550  APA1022020  [APA102-2020]  76.14,72.96 0 top
D551  APA1022020  [APA102-2020]  79.31,72.96 0 top
D552  APA1022020  [APA102-2020]  82.49,72.96 0 top
D553  APA1022020  [APA102-2020]  60.26,76.14 0 top
D554  APA1022020  [APA102-2020]  63.44,76.14 0 top
D555  APA1022020  [APA102-2020]  66.61,76.14 0 top
D556  APA1022020  [APA102-2020]  69.79,76.14 0 top
D557  APA1022020  [APA102-2020]  72.96,76.14 0 top
D558  APA1022020  [APA102-2020]  76.14,76.14 0 top
D559  APA1022020  [APA102-2020]  79.31,76.14 0 top
D560  APA1022020  [APA102-2020]  82.49,76.14 0 top
D561  APA1022020  [APA102-2020]  60.26,79.31 0 top
D562  APA1022020  [APA102-2020]  63.44,79.31 0 top
D563  APA1022020  [APA102-2020]  66.61,79.31 0 top
D564  APA1022020  [APA102-2020]  69.79,79.31 0 top
D565  APA1022020  [APA102-2020]  72.96,79.31 0 top
D566  APA1022020  [APA102-2020]  76.14,79.31 0 top
D567  APA1022020  [APA102-2020]  79.31,79.31 0 top
D568  APA1022020  [APA102-2020]  82.49,79.31 0 top
D569  APA1022020  [APA102-2020]  60.26,82.49 0 top
D570  APA1022020  [APA102-2020]  63.44,82.49 0 top
D571  APA1022020  [APA102-2020]  66.61,82.49 0 top
D572  APA1022020  [APA102-2020]  69.79,82.49 0 top
D573  APA1022020  [APA102-2020]  72.96,82.49 0 top
D574  APA1022020  [APA102-2020]  76.14,82.49 0 top
D575  APA1022020  [APA102-2020]  79.31,82.49 0 top
D576  APA1022020  [APA102-2020]  82.49,82.49 0 top
E$1  [FIDUCIAL-1X2]  13.72,86.17 0 top
E$2  [FIDUCIAL-1X2]  13.72,86.17 0 bottom
E$3  [FIDUCIAL-1X2]  77.22,86.17 0 top
E$4  [FIDUCIAL-1X2]  77.22,86.17 0 bottom
E$5  [FIDUCIAL-1.5X3]  13.72,4.76 0 top
E$6  [FIDUCIAL-1.5X3]  13.72,4.76 0 bottom
J1  LED_PADCIRCULARPAD  [CIRCULARPAD]  30.67,30.75 0 bottom
J2  LED_PADCIRCULARPAD  [CIRCULARPAD]  27.44,30.75 0 bottom
J3  LED_PADCIRCULARPAD  [CIRCULARPAD]  11.62,8.37 0 bottom
J4  LED_PADCIRCULARPAD  [CIRCULARPAD]  8.46,8.38 0 bottom
J5  LED_PADCIRCULARPAD  [CIRCULARPAD]  14.78,8.38 0 bottom
J6  LED_PADCIRCULARPAD  [CIRCULARPAD]  21.13,30.75 0 bottom
J7  LED_PADCIRCULARPAD  [CIRCULARPAD]  17.96,8.37 0 bottom
J8  LED_PADCIRCULARPAD  [CIRCULARPAD]  24.33,30.75 0 bottom
J9  LED_PADCIRCULARPAD  [CIRCULARPAD]  56.58,30.75 0 bottom
J10  LED_PADCIRCULARPAD  [CIRCULARPAD]  53.35,30.75 0 bottom
J11  LED_PADCIRCULARPAD  [CIRCULARPAD]  37.53,8.37 0 bottom
J12  LED_PADCIRCULARPAD  [CIRCULARPAD]  34.37,8.38 0 bottom
J13  LED_PADCIRCULARPAD  [CIRCULARPAD]  40.69,8.38 0 bottom
J14  LED_PADCIRCULARPAD  [CIRCULARPAD]  47.04,30.75 0 bottom
J15  LED_PADCIRCULARPAD  [CIRCULARPAD]  43.87,8.37 0 bottom
J16  LED_PADCIRCULARPAD  [CIRCULARPAD]  50.24,30.75 0 bottom
J17  LED_PADCIRCULARPAD  [CIRCULARPAD]  82.49,30.75 0 bottom
J18  LED_PADCIRCULARPAD  [CIRCULARPAD]  79.26,30.75 0 bottom
J19  LED_PADCIRCULARPAD  [CIRCULARPAD]  63.44,8.37 0 bottom
J20  LED_PADCIRCULARPAD  [CIRCULARPAD]  60.27,8.38 0 bottom
J21  LED_PADCIRCULARPAD  [CIRCULARPAD]  66.6,8.38 0 bottom
J22  LED_PADCIRCULARPAD  [CIRCULARPAD]  72.95,30.75 0 bottom
J23  LED_PADCIRCULARPAD  [CIRCULARPAD]  69.77,8.37 0 bottom
J24  LED_PADCIRCULARPAD  [CIRCULARPAD]  76.15,30.75 0 bottom
J25  LED_PADCIRCULARPAD  [CIRCULARPAD]  30.67,56.65 0 bottom
J26  LED_PADCIRCULARPAD  [CIRCULARPAD]  27.44,56.65 0 bottom
J27  LED_PADCIRCULARPAD  [CIRCULARPAD]  11.62,34.28 0 bottom
J28  LED_PADCIRCULARPAD  [CIRCULARPAD]  8.46,34.29 0 bottom
J29  LED_PADCIRCULARPAD  [CIRCULARPAD]  14.78,34.29 0 bottom
J30  LED_PADCIRCULARPAD  [CIRCULARPAD]  21.13,56.65 0 bottom
J31  LED_PADCIRCULARPAD  [CIRCULARPAD]  17.96,34.28 0 bottom
J32  LED_PADCIRCULARPAD  [CIRCULARPAD]  24.33,56.65 0 bottom
J33  LED_PADCIRCULARPAD  [CIRCULARPAD]  56.58,56.65 0 bottom
J34  LED_PADCIRCULARPAD  [CIRCULARPAD]  53.35,56.65 0 bottom
J35  LED_PADCIRCULARPAD  [CIRCULARPAD]  37.53,34.28 0 bottom
J36  LED_PADCIRCULARPAD  [CIRCULARPAD]  34.37,34.29 0 bottom
J37  LED_PADCIRCULARPAD  [CIRCULARPAD]  40.69,34.29 0 bottom
J38  LED_PADCIRCULARPAD  [CIRCULARPAD]  47.04,56.65 0 bottom
J39  LED_PADCIRCULARPAD  [CIRCULARPAD]  43.87,34.28 0 bottom
J40  LED_PADCIRCULARPAD  [CIRCULARPAD]  50.24,56.65 0 bottom
J41  LED_PADCIRCULARPAD  [CIRCULARPAD]  82.49,56.65 0 bottom
J42  LED_PADCIRCULARPAD  [CIRCULARPAD]  79.26,56.65 0 bottom
J43  LED_PADCIRCULARPAD  [CIRCULARPAD]  63.44,34.28 0 bottom
J44  LED_PADCIRCULARPAD  [CIRCULARPAD]  60.27,34.29 0 bottom
J45  LED_PADCIRCULARPAD  [CIRCULARPAD]  66.6,34.29 0 bottom
J46  LED_PADCIRCULARPAD  [CIRCULARPAD]  72.95,56.65 0 bottom
J47  LED_PADCIRCULARPAD  [CIRCULARPAD]  69.77,34.28 0 bottom
J48  LED_PADCIRCULARPAD  [CIRCULARPAD]  76.15,56.65 0 bottom
J49  LED_PADCIRCULARPAD  [CIRCULARPAD]  30.67,82.56 0 bottom
J50  LED_PADCIRCULARPAD  [CIRCULARPAD]  27.44,82.56 0 bottom
J51  LED_PADCIRCULARPAD  [CIRCULARPAD]  11.62,60.19 0 bottom
J52  LED_PADCIRCULARPAD  [CIRCULARPAD]  8.46,60.2 0 bottom
J53  LED_PADCIRCULARPAD  [CIRCULARPAD]  14.78,60.2 0 bottom
J54  LED_PADCIRCULARPAD  [CIRCULARPAD]  21.13,82.56 0 bottom
J55  LED_PADCIRCULARPAD  [CIRCULARPAD]  17.96,60.19 0 bottom
J56  LED_PADCIRCULARPAD  [CIRCULARPAD]  24.33,82.56 0 bottom
J57  LED_PADCIRCULARPAD  [CIRCULARPAD]  56.58,82.56 0 bottom
J58  LED_PADCIRCULARPAD  [CIRCULARPAD]  53.35,82.56 0 bottom
J59  LED_PADCIRCULARPAD  [CIRCULARPAD]  37.53,60.19 0 bottom
J60  LED_PADCIRCULARPAD  [CIRCULARPAD]  34.37,60.2 0 bottom
J61  LED_PADCIRCULARPAD  [CIRCULARPAD]  40.69,60.2 0 bottom
J62  LED_PADCIRCULARPAD  [CIRCULARPAD]  47.04,82.56 0 bottom
J63  LED_PADCIRCULARPAD  [CIRCULARPAD]  43.87,60.19 0 bottom
J64  LED_PADCIRCULARPAD  [CIRCULARPAD]  50.24,82.56 0 bottom
J65  LED_PADCIRCULARPAD  [CIRCULARPAD]  82.49,82.56 0 bottom
J66  LED_PADCIRCULARPAD  [CIRCULARPAD]  79.26,82.56 0 bottom
J67  LED_PADCIRCULARPAD  [CIRCULARPAD]  63.44,60.19 0 bottom
J68  LED_PADCIRCULARPAD  [CIRCULARPAD]  60.27,60.2 0 bottom
J69  LED_PADCIRCULARPAD  [CIRCULARPAD]  66.6,60.2 0 bottom
J70  LED_PADCIRCULARPAD  [CIRCULARPAD]  72.95,82.56 0 bottom
J71  LED_PADCIRCULARPAD  [CIRCULARPAD]  69.77,60.19 0 bottom
J72  LED_PADCIRCULARPAD  [CIRCULARPAD]  76.15,82.56 0 bottom

## Library data of the parts
D1-D576 = SparkFun-LED; PROD_ID: DIO-13883
E$1-E$4 = SparkFun-Aesthetics
E$5 E$6 = SparkFun-Retired
J1-J72 = Andy

## Nets
5V: D1.VDD D1.VDDPAD D2.VDD D2.VDDPAD D3.VDD D3.VDDPAD D4.VDD D4.VDDPAD D5.VDD D5.VDDPAD D6.VDD D6.VDDPAD D7.VDD D7.VDDPAD D8.VDD D8.VDDPAD D9.VDD D9.VDDPAD D10.VDD D10.VDDPAD D11.VDD D11.VDDPAD D12.VDD D12.VDDPAD D13.VDD D13.VDDPAD D14.VDD D14.VDDPAD D15.VDD D15.VDDPAD D16.VDD D16.VDDPAD D17.VDD D17.VDDPAD D18.VDD D18.VDDPAD D19.VDD D19.VDDPAD D20.VDD D20.VDDPAD D21.VDD D21.VDDPAD D22.VDD D22.VDDPAD D23.VDD D23.VDDPAD D24.VDD D24.VDDPAD D25.VDD D25.VDDPAD D26.VDD D26.VDDPAD D27.VDD D27.VDDPAD D28.VDD D28.VDDPAD D29.VDD D29.VDDPAD D30.VDD D30.VDDPAD D31.VDD D31.VDDPAD D32.VDD D32.VDDPAD D33.VDD D33.VDDPAD D34.VDD D34.VDDPAD D35.VDD D35.VDDPAD D36.VDD D36.VDDPAD D37.VDD D37.VDDPAD D38.VDD D38.VDDPAD D39.VDD D39.VDDPAD D40.VDD D40.VDDPAD D41.VDD D41.VDDPAD D42.VDD D42.VDDPAD D43.VDD D43.VDDPAD D44.VDD D44.VDDPAD D45.VDD D45.VDDPAD D46.VDD D46.VDDPAD D47.VDD D47.VDDPAD D48.VDD D48.VDDPAD D49.VDD D49.VDDPAD D50.VDD D50.VDDPAD D51.VDD D51.VDDPAD D52.VDD D52.VDDPAD D53.VDD D53.VDDPAD D54.VDD D54.VDDPAD D55.VDD D55.VDDPAD D56.VDD D56.VDDPAD D57.VDD D57.VDDPAD D58.VDD D58.VDDPAD D59.VDD D59.VDDPAD D60.VDD D60.VDDPAD D61.VDD D61.VDDPAD D62.VDD D62.VDDPAD D63.VDD D63.VDDPAD D64.VDD D64.VDDPAD J5.P$1 J8.P$1
5V1: D65.VDD D65.VDDPAD D66.VDD D66.VDDPAD D67.VDD D67.VDDPAD D68.VDD D68.VDDPAD D69.VDD D69.VDDPAD D70.VDD D70.VDDPAD D71.VDD D71.VDDPAD D72.VDD D72.VDDPAD D73.VDD D73.VDDPAD D74.VDD D74.VDDPAD D75.VDD D75.VDDPAD D76.VDD D76.VDDPAD D77.VDD D77.VDDPAD D78.VDD D78.VDDPAD D79.VDD D79.VDDPAD D80.VDD D80.VDDPAD D81.VDD D81.VDDPAD D82.VDD D82.VDDPAD D83.VDD D83.VDDPAD D84.VDD D84.VDDPAD D85.VDD D85.VDDPAD D86.VDD D86.VDDPAD D87.VDD D87.VDDPAD D88.VDD D88.VDDPAD D89.VDD D89.VDDPAD D90.VDD D90.VDDPAD D91.VDD D91.VDDPAD D92.VDD D92.VDDPAD D93.VDD D93.VDDPAD D94.VDD D94.VDDPAD D95.VDD D95.VDDPAD D96.VDD D96.VDDPAD D97.VDD D97.VDDPAD D98.VDD D98.VDDPAD D99.VDD D99.VDDPAD D100.VDD D100.VDDPAD D101.VDD D101.VDDPAD D102.VDD D102.VDDPAD D103.VDD D103.VDDPAD D104.VDD D104.VDDPAD D105.VDD D105.VDDPAD D106.VDD D106.VDDPAD D107.VDD D107.VDDPAD D108.VDD D108.VDDPAD D109.VDD D109.VDDPAD D110.VDD D110.VDDPAD D111.VDD D111.VDDPAD D112.VDD D112.VDDPAD D113.VDD D113.VDDPAD D114.VDD D114.VDDPAD D115.VDD D115.VDDPAD D116.VDD D116.VDDPAD D117.VDD D117.VDDPAD D118.VDD D118.VDDPAD D119.VDD D119.VDDPAD D120.VDD D120.VDDPAD D121.VDD D121.VDDPAD D122.VDD D122.VDDPAD D123.VDD D123.VDDPAD D124.VDD D124.VDDPAD D125.VDD D125.VDDPAD D126.VDD D126.VDDPAD D127.VDD D127.VDDPAD D128.VDD D128.VDDPAD J13.P$1 J16.P$1
5V2: D129.VDD D129.VDDPAD D130.VDD D130.VDDPAD D131.VDD D131.VDDPAD D132.VDD D132.VDDPAD D133.VDD D133.VDDPAD D134.VDD D134.VDDPAD D135.VDD D135.VDDPAD D136.VDD D136.VDDPAD D137.VDD D137.VDDPAD D138.VDD D138.VDDPAD D139.VDD D139.VDDPAD D140.VDD D140.VDDPAD D141.VDD D141.VDDPAD D142.VDD D142.VDDPAD D143.VDD D143.VDDPAD D144.VDD D144.VDDPAD D145.VDD D145.VDDPAD D146.VDD D146.VDDPAD D147.VDD D147.VDDPAD D148.VDD D148.VDDPAD D149.VDD D149.VDDPAD D150.VDD D150.VDDPAD D151.VDD D151.VDDPAD D152.VDD D152.VDDPAD D153.VDD D153.VDDPAD D154.VDD D154.VDDPAD D155.VDD D155.VDDPAD D156.VDD D156.VDDPAD D157.VDD D157.VDDPAD D158.VDD D158.VDDPAD D159.VDD D159.VDDPAD D160.VDD D160.VDDPAD D161.VDD D161.VDDPAD D162.VDD D162.VDDPAD D163.VDD D163.VDDPAD D164.VDD D164.VDDPAD D165.VDD D165.VDDPAD D166.VDD D166.VDDPAD D167.VDD D167.VDDPAD D168.VDD D168.VDDPAD D169.VDD D169.VDDPAD D170.VDD D170.VDDPAD D171.VDD D171.VDDPAD D172.VDD D172.VDDPAD D173.VDD D173.VDDPAD D174.VDD D174.VDDPAD D175.VDD D175.VDDPAD D176.VDD D176.VDDPAD D177.VDD D177.VDDPAD D178.VDD D178.VDDPAD D179.VDD D179.VDDPAD D180.VDD D180.VDDPAD D181.VDD D181.VDDPAD D182.VDD D182.VDDPAD D183.VDD D183.VDDPAD D184.VDD D184.VDDPAD D185.VDD D185.VDDPAD D186.VDD D186.VDDPAD D187.VDD D187.VDDPAD D188.VDD D188.VDDPAD D189.VDD D189.VDDPAD D190.VDD D190.VDDPAD D191.VDD D191.VDDPAD D192.VDD D192.VDDPAD J21.P$1 J24.P$1
5V3: D193.VDD D193.VDDPAD D194.VDD D194.VDDPAD D195.VDD D195.VDDPAD D196.VDD D196.VDDPAD D197.VDD D197.VDDPAD D198.VDD D198.VDDPAD D199.VDD D199.VDDPAD D200.VDD D200.VDDPAD D201.VDD D201.VDDPAD D202.VDD D202.VDDPAD D203.VDD D203.VDDPAD D204.VDD D204.VDDPAD D205.VDD D205.VDDPAD D206.VDD D206.VDDPAD D207.VDD D207.VDDPAD D208.VDD D208.VDDPAD D209.VDD D209.VDDPAD D210.VDD D210.VDDPAD D211.VDD D211.VDDPAD D212.VDD D212.VDDPAD D213.VDD D213.VDDPAD D214.VDD D214.VDDPAD D215.VDD D215.VDDPAD D216.VDD D216.VDDPAD D217.VDD D217.VDDPAD D218.VDD D218.VDDPAD D219.VDD D219.VDDPAD D220.VDD D220.VDDPAD D221.VDD D221.VDDPAD D222.VDD D222.VDDPAD D223.VDD D223.VDDPAD D224.VDD D224.VDDPAD D225.VDD D225.VDDPAD D226.VDD D226.VDDPAD D227.VDD D227.VDDPAD D228.VDD D228.VDDPAD D229.VDD D229.VDDPAD D230.VDD D230.VDDPAD D231.VDD D231.VDDPAD D232.VDD D232.VDDPAD D233.VDD D233.VDDPAD D234.VDD D234.VDDPAD D235.VDD D235.VDDPAD D236.VDD D236.VDDPAD D237.VDD D237.VDDPAD D238.VDD D238.VDDPAD D239.VDD D239.VDDPAD D240.VDD D240.VDDPAD D241.VDD D241.VDDPAD D242.VDD D242.VDDPAD D243.VDD D243.VDDPAD D244.VDD D244.VDDPAD D245.VDD D245.VDDPAD D246.VDD D246.VDDPAD D247.VDD D247.VDDPAD D248.VDD D248.VDDPAD D249.VDD D249.VDDPAD D250.VDD D250.VDDPAD D251.VDD D251.VDDPAD D252.VDD D252.VDDPAD D253.VDD D253.VDDPAD D254.VDD D254.VDDPAD D255.VDD D255.VDDPAD D256.VDD D256.VDDPAD J29.P$1 J32.P$1
5V4: D257.VDD D257.VDDPAD D258.VDD D258.VDDPAD D259.VDD D259.VDDPAD D260.VDD D260.VDDPAD D261.VDD D261.VDDPAD D262.VDD D262.VDDPAD D263.VDD D263.VDDPAD D264.VDD D264.VDDPAD D265.VDD D265.VDDPAD D266.VDD D266.VDDPAD D267.VDD D267.VDDPAD D268.VDD D268.VDDPAD D269.VDD D269.VDDPAD D270.VDD D270.VDDPAD D271.VDD D271.VDDPAD D272.VDD D272.VDDPAD D273.VDD D273.VDDPAD D274.VDD D274.VDDPAD D275.VDD D275.VDDPAD D276.VDD D276.VDDPAD D277.VDD D277.VDDPAD D278.VDD D278.VDDPAD D279.VDD D279.VDDPAD D280.VDD D280.VDDPAD D281.VDD D281.VDDPAD D282.VDD D282.VDDPAD D283.VDD D283.VDDPAD D284.VDD D284.VDDPAD D285.VDD D285.VDDPAD D286.VDD D286.VDDPAD D287.VDD D287.VDDPAD D288.VDD D288.VDDPAD D289.VDD D289.VDDPAD D290.VDD D290.VDDPAD D291.VDD D291.VDDPAD D292.VDD D292.VDDPAD D293.VDD D293.VDDPAD D294.VDD D294.VDDPAD D295.VDD D295.VDDPAD D296.VDD D296.VDDPAD D297.VDD D297.VDDPAD D298.VDD D298.VDDPAD D299.VDD D299.VDDPAD D300.VDD D300.VDDPAD D301.VDD D301.VDDPAD D302.VDD D302.VDDPAD D303.VDD D303.VDDPAD D304.VDD D304.VDDPAD D305.VDD D305.VDDPAD D306.VDD D306.VDDPAD D307.VDD D307.VDDPAD D308.VDD D308.VDDPAD D309.VDD D309.VDDPAD D310.VDD D310.VDDPAD D311.VDD D311.VDDPAD D312.VDD D312.VDDPAD D313.VDD D313.VDDPAD D314.VDD D314.VDDPAD D315.VDD D315.VDDPAD D316.VDD D316.VDDPAD D317.VDD D317.VDDPAD D318.VDD D318.VDDPAD D319.VDD D319.VDDPAD D320.VDD D320.VDDPAD J37.P$1 J40.P$1
5V5: D321.VDD D321.VDDPAD D322.VDD D322.VDDPAD D323.VDD D323.VDDPAD D324.VDD D324.VDDPAD D325.VDD D325.VDDPAD D326.VDD D326.VDDPAD D327.VDD D327.VDDPAD D328.VDD D328.VDDPAD D329.VDD D329.VDDPAD D330.VDD D330.VDDPAD D331.VDD D331.VDDPAD D332.VDD D332.VDDPAD D333.VDD D333.VDDPAD D334.VDD D334.VDDPAD D335.VDD D335.VDDPAD D336.VDD D336.VDDPAD D337.VDD D337.VDDPAD D338.VDD D338.VDDPAD D339.VDD D339.VDDPAD D340.VDD D340.VDDPAD D341.VDD D341.VDDPAD D342.VDD D342.VDDPAD D343.VDD D343.VDDPAD D344.VDD D344.VDDPAD D345.VDD D345.VDDPAD D346.VDD D346.VDDPAD D347.VDD D347.VDDPAD D348.VDD D348.VDDPAD D349.VDD D349.VDDPAD D350.VDD D350.VDDPAD D351.VDD D351.VDDPAD D352.VDD D352.VDDPAD D353.VDD D353.VDDPAD D354.VDD D354.VDDPAD D355.VDD D355.VDDPAD D356.VDD D356.VDDPAD D357.VDD D357.VDDPAD D358.VDD D358.VDDPAD D359.VDD D359.VDDPAD D360.VDD D360.VDDPAD D361.VDD D361.VDDPAD D362.VDD D362.VDDPAD D363.VDD D363.VDDPAD D364.VDD D364.VDDPAD D365.VDD D365.VDDPAD D366.VDD D366.VDDPAD D367.VDD D367.VDDPAD D368.VDD D368.VDDPAD D369.VDD D369.VDDPAD D370.VDD D370.VDDPAD D371.VDD D371.VDDPAD D372.VDD D372.VDDPAD D373.VDD D373.VDDPAD D374.VDD D374.VDDPAD D375.VDD D375.VDDPAD D376.VDD D376.VDDPAD D377.VDD D377.VDDPAD D378.VDD D378.VDDPAD D379.VDD D379.VDDPAD D380.VDD D380.VDDPAD D381.VDD D381.VDDPAD D382.VDD D382.VDDPAD D383.VDD D383.VDDPAD D384.VDD D384.VDDPAD J45.P$1 J48.P$1
5V6: D385.VDD D385.VDDPAD D386.VDD D386.VDDPAD D387.VDD D387.VDDPAD D388.VDD D388.VDDPAD D389.VDD D389.VDDPAD D390.VDD D390.VDDPAD D391.VDD D391.VDDPAD D392.VDD D392.VDDPAD D393.VDD D393.VDDPAD D394.VDD D394.VDDPAD D395.VDD D395.VDDPAD D396.VDD D396.VDDPAD D397.VDD D397.VDDPAD D398.VDD D398.VDDPAD D399.VDD D399.VDDPAD D400.VDD D400.VDDPAD D401.VDD D401.VDDPAD D402.VDD D402.VDDPAD D403.VDD D403.VDDPAD D404.VDD D404.VDDPAD D405.VDD D405.VDDPAD D406.VDD D406.VDDPAD D407.VDD D407.VDDPAD D408.VDD D408.VDDPAD D409.VDD D409.VDDPAD D410.VDD D410.VDDPAD D411.VDD D411.VDDPAD D412.VDD D412.VDDPAD D413.VDD D413.VDDPAD D414.VDD D414.VDDPAD D415.VDD D415.VDDPAD D416.VDD D416.VDDPAD D417.VDD D417.VDDPAD D418.VDD D418.VDDPAD D419.VDD D419.VDDPAD D420.VDD D420.VDDPAD D421.VDD D421.VDDPAD D422.VDD D422.VDDPAD D423.VDD D423.VDDPAD D424.VDD D424.VDDPAD D425.VDD D425.VDDPAD D426.VDD D426.VDDPAD D427.VDD D427.VDDPAD D428.VDD D428.VDDPAD D429.VDD D429.VDDPAD D430.VDD D430.VDDPAD D431.VDD D431.VDDPAD D432.VDD D432.VDDPAD D433.VDD D433.VDDPAD D434.VDD D434.VDDPAD D435.VDD D435.VDDPAD D436.VDD D436.VDDPAD D437.VDD D437.VDDPAD D438.VDD D438.VDDPAD D439.VDD D439.VDDPAD D440.VDD D440.VDDPAD D441.VDD D441.VDDPAD D442.VDD D442.VDDPAD D443.VDD D443.VDDPAD D444.VDD D444.VDDPAD D445.VDD D445.VDDPAD D446.VDD D446.VDDPAD D447.VDD D447.VDDPAD D448.VDD D448.VDDPAD J53.P$1 J56.P$1
5V7: D449.VDD D449.VDDPAD D450.VDD D450.VDDPAD D451.VDD D451.VDDPAD D452.VDD D452.VDDPAD D453.VDD D453.VDDPAD D454.VDD D454.VDDPAD D455.VDD D455.VDDPAD D456.VDD D456.VDDPAD D457.VDD D457.VDDPAD D458.VDD D458.VDDPAD D459.VDD D459.VDDPAD D460.VDD D460.VDDPAD D461.VDD D461.VDDPAD D462.VDD D462.VDDPAD D463.VDD D463.VDDPAD D464.VDD D464.VDDPAD D465.VDD D465.VDDPAD D466.VDD D466.VDDPAD D467.VDD D467.VDDPAD D468.VDD D468.VDDPAD D469.VDD D469.VDDPAD D470.VDD D470.VDDPAD D471.VDD D471.VDDPAD D472.VDD D472.VDDPAD D473.VDD D473.VDDPAD D474.VDD D474.VDDPAD D475.VDD D475.VDDPAD D476.VDD D476.VDDPAD D477.VDD D477.VDDPAD D478.VDD D478.VDDPAD D479.VDD D479.VDDPAD D480.VDD D480.VDDPAD D481.VDD D481.VDDPAD D482.VDD D482.VDDPAD D483.VDD D483.VDDPAD D484.VDD D484.VDDPAD D485.VDD D485.VDDPAD D486.VDD D486.VDDPAD D487.VDD D487.VDDPAD D488.VDD D488.VDDPAD D489.VDD D489.VDDPAD D490.VDD D490.VDDPAD D491.VDD D491.VDDPAD D492.VDD D492.VDDPAD D493.VDD D493.VDDPAD D494.VDD D494.VDDPAD D495.VDD D495.VDDPAD D496.VDD D496.VDDPAD D497.VDD D497.VDDPAD D498.VDD D498.VDDPAD D499.VDD D499.VDDPAD D500.VDD D500.VDDPAD D501.VDD D501.VDDPAD D502.VDD D502.VDDPAD D503.VDD D503.VDDPAD D504.VDD D504.VDDPAD D505.VDD D505.VDDPAD D506.VDD D506.VDDPAD D507.VDD D507.VDDPAD D508.VDD D508.VDDPAD D509.VDD D509.VDDPAD D510.VDD D510.VDDPAD D511.VDD D511.VDDPAD D512.VDD D512.VDDPAD J61.P$1 J64.P$1
5V8: D513.VDD D513.VDDPAD D514.VDD D514.VDDPAD D515.VDD D515.VDDPAD D516.VDD D516.VDDPAD D517.VDD D517.VDDPAD D518.VDD D518.VDDPAD D519.VDD D519.VDDPAD D520.VDD D520.VDDPAD D521.VDD D521.VDDPAD D522.VDD D522.VDDPAD D523.VDD D523.VDDPAD D524.VDD D524.VDDPAD D525.VDD D525.VDDPAD D526.VDD D526.VDDPAD D527.VDD D527.VDDPAD D528.VDD D528.VDDPAD D529.VDD D529.VDDPAD D530.VDD D530.VDDPAD D531.VDD D531.VDDPAD D532.VDD D532.VDDPAD D533.VDD D533.VDDPAD D534.VDD D534.VDDPAD D535.VDD D535.VDDPAD D536.VDD D536.VDDPAD D537.VDD D537.VDDPAD D538.VDD D538.VDDPAD D539.VDD D539.VDDPAD D540.VDD D540.VDDPAD D541.VDD D541.VDDPAD D542.VDD D542.VDDPAD D543.VDD D543.VDDPAD D544.VDD D544.VDDPAD D545.VDD D545.VDDPAD D546.VDD D546.VDDPAD D547.VDD D547.VDDPAD D548.VDD D548.VDDPAD D549.VDD D549.VDDPAD D550.VDD D550.VDDPAD D551.VDD D551.VDDPAD D552.VDD D552.VDDPAD D553.VDD D553.VDDPAD D554.VDD D554.VDDPAD D555.VDD D555.VDDPAD D556.VDD D556.VDDPAD D557.VDD D557.VDDPAD D558.VDD D558.VDDPAD D559.VDD D559.VDDPAD D560.VDD D560.VDDPAD D561.VDD D561.VDDPAD D562.VDD D562.VDDPAD D563.VDD D563.VDDPAD D564.VDD D564.VDDPAD D565.VDD D565.VDDPAD D566.VDD D566.VDDPAD D567.VDD D567.VDDPAD D568.VDD D568.VDDPAD D569.VDD D569.VDDPAD D570.VDD D570.VDDPAD D571.VDD D571.VDDPAD D572.VDD D572.VDDPAD D573.VDD D573.VDDPAD D574.VDD D574.VDDPAD D575.VDD D575.VDDPAD D576.VDD D576.VDDPAD J69.P$1 J72.P$1
CI: D1.CKI J4.P$1
CI1: D65.CKI J12.P$1
CI2: D129.CKI J20.P$1
CI3: D193.CKI J28.P$1
CI4: D257.CKI J36.P$1
CI5: D321.CKI J44.P$1
CI6: D385.CKI J52.P$1
CI7: D449.CKI J60.P$1
CI8: D513.CKI J68.P$1
CO: D64.CKO J1.P$1
CO1: D128.CKO J9.P$1
CO2: D192.CKO J17.P$1
CO3: D256.CKO J25.P$1
CO4: D320.CKO J33.P$1
CO5: D384.CKO J41.P$1
CO6: D448.CKO J49.P$1
CO7: D512.CKO J57.P$1
CO8: D576.CKO J65.P$1
CT1: D9.CKO D10.CKI
CT2: D18.CKO D19.CKI
CT3: D27.CKO D28.CKI
CT4: D36.CKO D37.CKI
CT5: D45.CKO D46.CKI
CT6: D54.CKO D55.CKI
CT7: D63.CKO D64.CKI
CT8: D127.CKO D128.CKI
CT9: D73.CKO D74.CKI
CT10: D82.CKO D83.CKI
CT11: D91.CKO D92.CKI
CT12: D100.CKO D101.CKI
CT13: D109.CKO D110.CKI
CT14: D118.CKO D119.CKI
CT15: D191.CKO D192.CKI
CT16: D137.CKO D138.CKI
CT17: D146.CKO D147.CKI
CT18: D155.CKO D156.CKI
CT19: D164.CKO D165.CKI
CT20: D173.CKO D174.CKI
CT21: D182.CKO D183.CKI
CT22: D255.CKO D256.CKI
CT23: D201.CKO D202.CKI
CT24: D210.CKO D211.CKI
CT25: D219.CKO D220.CKI
CT26: D228.CKO D229.CKI
CT27: D237.CKO D238.CKI
CT28: D246.CKO D247.CKI
CT29: D319.CKO D320.CKI
CT30: D265.CKO D266.CKI
CT31: D274.CKO D275.CKI
CT32: D283.CKO D284.CKI
CT33: D292.CKO D293.CKI
CT34: D301.CKO D302.CKI
CT35: D310.CKO D311.CKI
CT36: D383.CKO D384.CKI
CT37: D329.CKO D330.CKI
CT38: D338.CKO D339.CKI
CT39: D347.CKO D348.CKI
CT40: D356.CKO D357.CKI
CT41: D365.CKO D366.CKI
CT42: D374.CKO D375.CKI
CT43: D447.CKO D448.CKI
CT44: D393.CKO D394.CKI
CT45: D402.CKO D403.CKI
CT46: D411.CKO D412.CKI
CT47: D420.CKO D421.CKI
CT48: D429.CKO D430.CKI
CT49: D438.CKO D439.CKI
CT50: D511.CKO D512.CKI
CT51: D457.CKO D458.CKI
CT52: D466.CKO D467.CKI
CT53: D475.CKO D476.CKI
CT54: D484.CKO D485.CKI
CT55: D493.CKO D494.CKI
CT56: D502.CKO D503.CKI
CT57: D575.CKO D576.CKI
CT58: D521.CKO D522.CKI
CT59: D530.CKO D531.CKI
CT60: D539.CKO D540.CKI
CT61: D548.CKO D549.CKI
CT62: D557.CKO D558.CKI
CT63: D566.CKO D567.CKI
DI: D1.SDI J3.P$1
DI1: D65.SDI J11.P$1
DI2: D129.SDI J19.P$1
DI3: D193.SDI J27.P$1
DI4: D257.SDI J35.P$1
DI5: D321.SDI J43.P$1
DI6: D385.SDI J51.P$1
DI7: D449.SDI J59.P$1
DI8: D513.SDI J67.P$1
DO: D64.SDO J2.P$1
DO1: D128.SDO J10.P$1
DO2: D192.SDO J18.P$1
DO3: D256.SDO J26.P$1
DO4: D320.SDO J34.P$1
DO5: D384.SDO J42.P$1
DO6: D448.SDO J50.P$1
DO7: D512.SDO J58.P$1
DO8: D576.SDO J66.P$1
DT1: D9.SDO D10.SDI
DT2: D18.SDO D19.SDI
DT3: D27.SDO D28.SDI
DT4: D36.SDO D37.SDI
DT5: D45.SDO D46.SDI
DT6: D54.SDO D55.SDI
DT7: D63.SDO D64.SDI
DT8: D127.SDO D128.SDI
DT9: D73.SDO D74.SDI
DT10: D82.SDO D83.SDI
DT11: D91.SDO D92.SDI
DT12: D100.SDO D101.SDI
DT13: D109.SDO D110.SDI
DT14: D118.SDO D119.SDI
DT15: D191.SDO D192.SDI
DT16: D137.SDO D138.SDI
DT17: D146.SDO D147.SDI
DT18: D155.SDO D156.SDI
DT19: D164.SDO D165.SDI
DT20: D173.SDO D174.SDI
DT21: D182.SDO D183.SDI
DT22: D255.SDO D256.SDI
DT23: D201.SDO D202.SDI
DT24: D210.SDO D211.SDI